# EAGLE board BSPD (EAGLE 9.2.1)
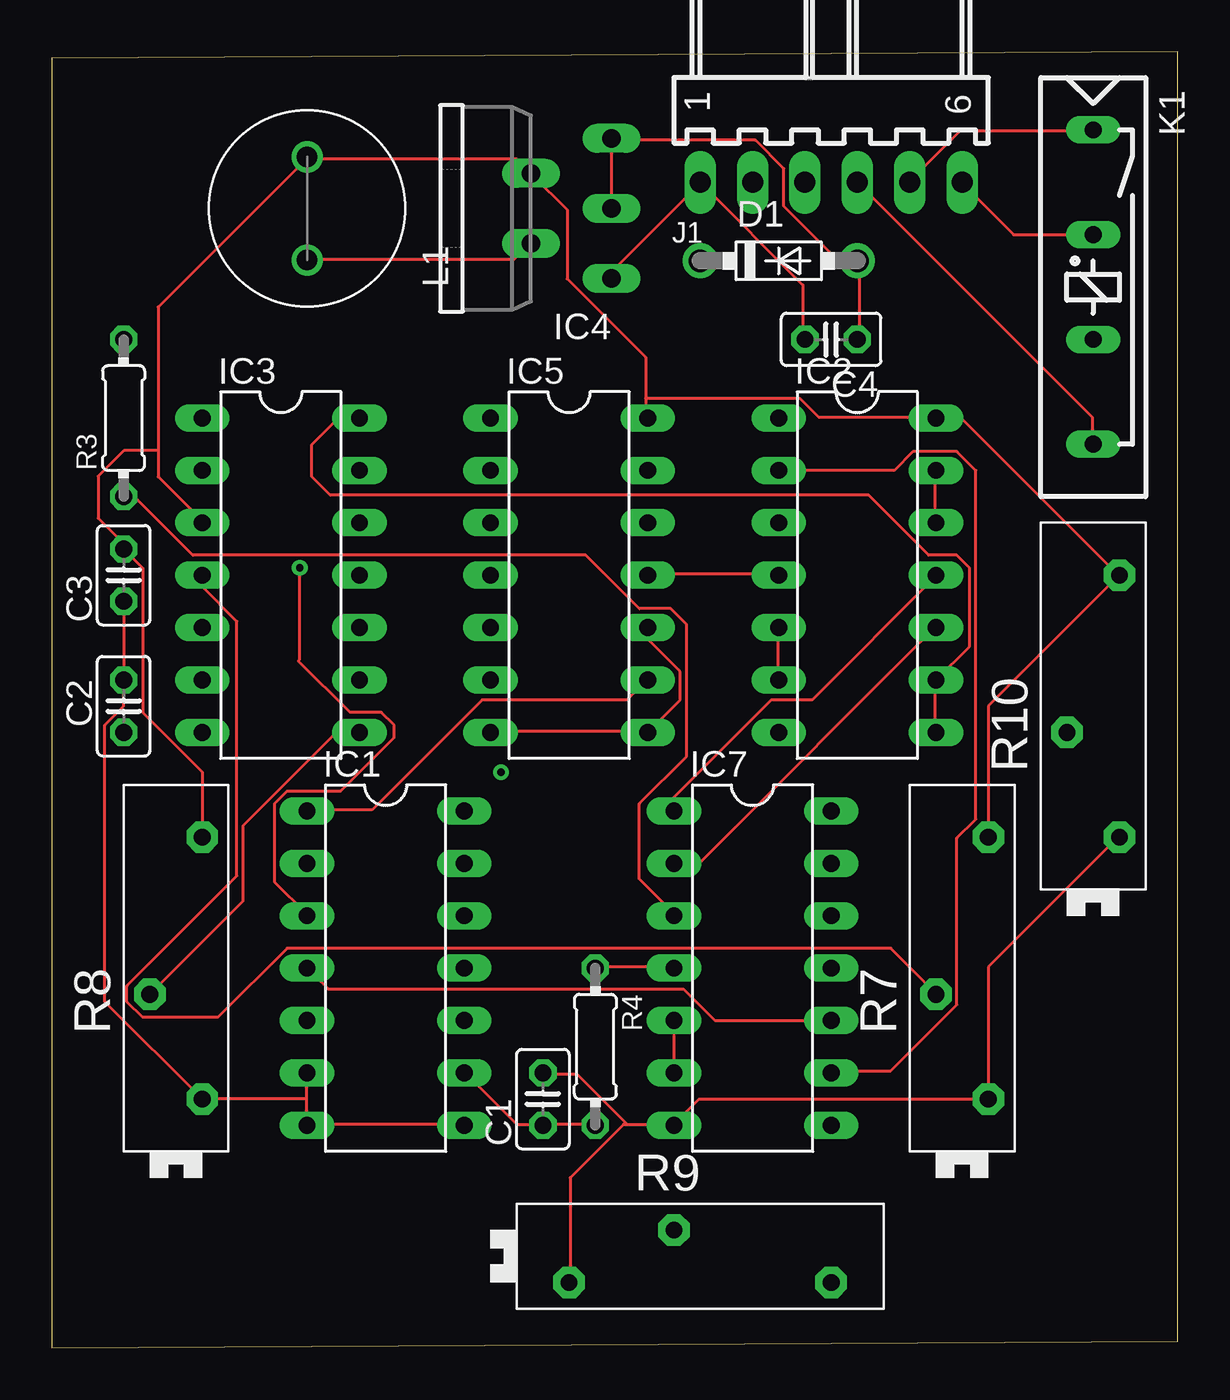
[diagram p0: board, top side]
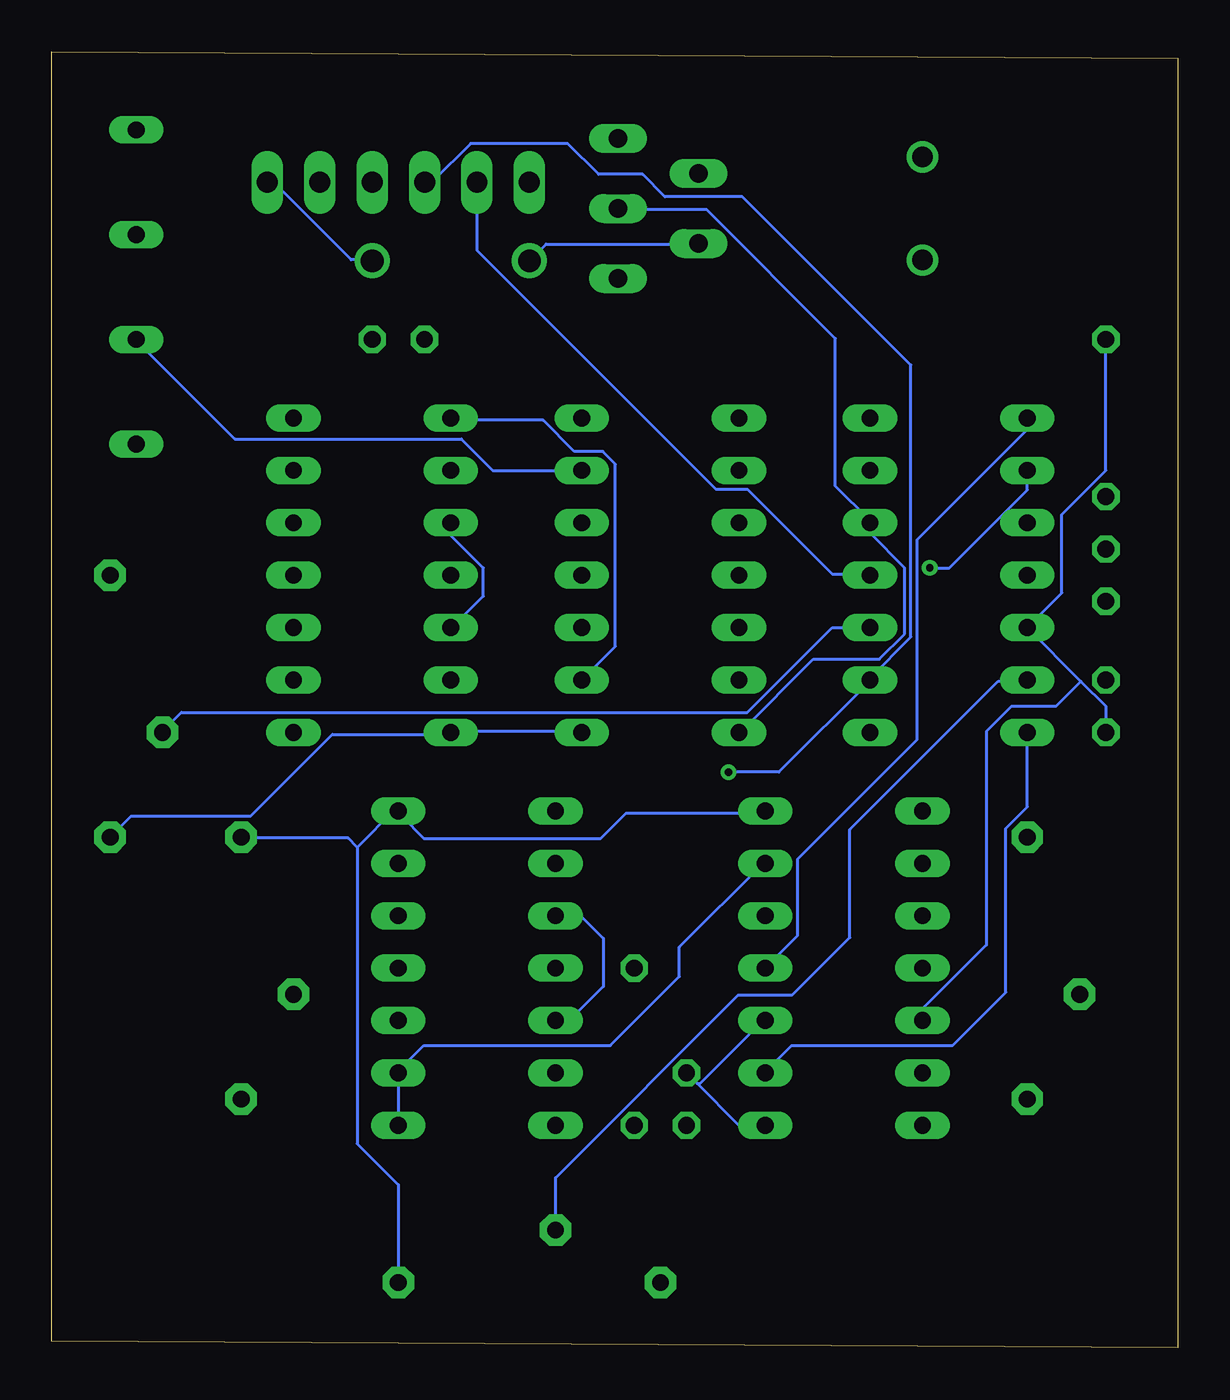
[diagram p1: board, bottom side, seen from below]

Size 54.59 x 62.85 mm. Coordinates in mm from the lower left corner, seen from the top.
Outline: 0,0 54.59,0.32 54.59,62.85 0,62.53 0,0
Copper layers (1*16): Top 0.035mm / dielectric 1.5mm / Bottom 0.035mm
Design rules "default": minimum track width 6mil, minimum drill 0.35mm, track to track 6mil, track to pad 6mil, pad to pad 6mil, via to via 6mil, smd to smd 6mil, copper to edge 40mil, drill to drill 6mil, minimum pad ring 10mil, minimum via ring 8mil, stop-mask expansion 4mil, vias tented up to drill 0mil, thermal gap 10mil

## Footprints (pad centres in the part's own frame; a part is rotated, then mirrored left to right if it is on the bottom)
C025-025X050 = drill 0.813 octagon: 1 -1.27,0; 2 1.27,0
DO41-7.6 = drill 1.1 pad 1.7: A 3.81,0; C -3.81,0
DIL14 = drill 0.813 long: 1 -7.62,-3.81; 2 -5.08,-3.81; 3 -2.54,-3.81; 4 0,-3.81; 5 2.54,-3.81; 6 5.08,-3.81; 7 7.62,-3.81; 8 7.62,3.81; 9 5.08,3.81; 10 2.54,3.81; 11 0,3.81; 12 -2.54,3.81; 13 -5.08,3.81; 14 -7.62,3.81
TO220-5 = drill 0.9 long: 1 -3.4,-8.4; 2 -1.7,-4.5; 3 0,-8.4; 4 1.7,-4.5; 5 3.4,-8.4
7395-06 = drill 1.016 long: 1 6.35,0; 2 3.81,0; 3 1.27,0; 4 -1.27,0; 5 -3.81,0; 6 -6.35,0
REED = drill 0.813 long: 1 -17.78,2.54; 3 -12.7,2.54; 5 -7.62,2.54; 7 -2.54,2.54
WE-TI_8012 = drill 1: 1 -2.5,0; 2 2.5,0
0204/7 = drill 0.813 octagon: 1 -3.81,0; 2 3.81,0
PT-SPIN = drill 0.813 pad 1.524 octagon: 1 -6.35,-1.27; 2 6.35,-1.27; 3 -1.27,1.27

## Placement (x,y rotation side)
C1  100mF  [C025-025X050]  23.81,12.06 90 top
C2  500uF  [C025-025X050]  3.49,31.12 90 top
C3  100uF  [C025-025X050]  3.49,37.47 90 top
C4  100uF  [C025-025X050]  37.78,48.89 180 top
D1  1N5817-B  [DO41-7.6]  35.24,52.7 0 top
IC1  4013N  [DIL14]  16.19,18.41 270 top
IC2  4001N  [DIL14]  39.05,37.47 270 top
IC3  LM2901N  [DIL14]  11.11,37.47 270 top
IC4  LM2576T  [TO220-5]  18.73,55.25 90 top
IC5  4013N  [DIL14]  25.08,37.47 270 top
IC7  4001N  [DIL14]  33.97,18.41 270 top
J1  22-05-7068-06  [7395-06]  37.78,56.52 180 top
K1  35701331  [REED]  47.94,41.28 270 top
L1  100uH  [WE-TI_8012]  12.38,55.25 90 top
R3  3k  [0204/7]  3.49,45.09 90 top
R4  3k  [0204/7]  26.35,14.61 270 top
R7  [PT-SPIN]  44.13,18.41 90 top
R8  [PT-SPIN]  6.03,18.41 90 top
R9  [PT-SPIN]  31.43,4.45 0 top
R10  [PT-SPIN]  50.48,31.12 90 top

## Library data of the parts
C1-C4 = rcl; SPICEPREFIX: C
D1 = diode
IC1 IC2 IC5 IC7 = 40xx
IC3 = linear
IC4 = v-reg-3
J1 = con-molex; MF: MOLEX; OC_FARNELL: unknown; OC_NEWARK: unknown
K1 = relay; OC_FARNELL: unknown; OC_NEWARK: unknown
L1 = wurth_elektronik_passive_rev16d
R3 R4 = rcl; SPICEPREFIX: R
R7-R10 = rcl; SPICEMODEL: POT; SPICEPREFIX: X

## Nets
0: C1.2 C2.2 C3.1 C4.1 D1.A IC1.6 IC1.7 IC1.8 IC1.10 IC2.7 IC3.12 IC4.3 IC4.5 IC5.7 IC5.8 IC5.10 IC7.7 J1.6 K1.3 R7.1 R8.1 R9.1 R10.1
5V: C3.2 IC1.14 IC2.14 IC3.3 IC4.4 IC5.14 IC7.14 L1.2 R7.2 R8.2 R9.2 R10.2
BP: IC3.9 J1.3
N$1: C2.1 IC1.5 IC3.5 R3.2
N$2: IC3.4 R7.3
N$3: C1.1 IC1.9 IC3.7 R4.2
N$4: IC3.6 R9.3
N$5: IC1.11 IC3.1
N$6: IC1.3 IC3.2
N$7: IC2.12 IC2.13
N$8: IC1.13 IC2.2 IC7.8 IC7.9
N$9: IC1.1 IC2.1 IC5.9
N$10: IC2.4 IC5.11
N$11: IC7.4 R4.1
N$12: IC5.13 K1.5
N$13: IC3.10 R10.3
N$14: IC3.8 R8.3
N$15: IC2.8 IC2.9 IC3.14
N$16: D1.C IC4.2 L1.1
N$17: IC2.11 IC7.1
N$18: IC2.10 IC7.2
N$19: IC2.3 IC2.5 IC2.6
N$21: IC1.4 IC7.10
OUT: J1.4 K1.7
SDS: J1.5 K1.1
TPS: IC3.11 J1.2
TPS&BP: IC7.3 IC7.5 IC7.6 R3.1
VBAT: C4.2 IC4.1 J1.1

## Tracks (layer width: path | path; a pad name or v marks a point on that pad's centre or on a via)
0
  Top 0.152: C3.1 C2.2 3.49,31.12 2.58,30.2 2.58,16.79 R8.1 12.33,12.06 | 12.33,12.06 12.33,13.28 IC1.6 | 12.33,12.06 12.33,10.85 IC1.7 12.48,10.85 19.95,10.85 IC1.8 | K1.3 46.62,53.97 44.18,56.41 J1.6 | IC4.3 27.11,55.35 27.11,58.55 IC4.5 27.27,58.55 34.12,58.55 35.5,57.17 35.5,55.35 38.09,52.76 39,52.76 D1.A 39.15,52.6 39.15,48.95 C4.1 | IC5.7 21.32,29.9 28.79,29.9 IC5.8 30.47,31.42 30.47,32.79 28.94,34.31 28.94,34.92 IC5.10 | R10.1 51.65,24.71 45.4,18.47 R7.1 31.38,12.06 30.16,10.85 | 27.89,10.85 27.72,10.85 25.13,8.26 25.13,3.23 R9.1 | 27.89,10.85 30.16,10.85 | 27.89,10.85 25.45,13.28 23.91,13.28 C1.2 | 30.16,10.85 IC7.7
  Bottom 0.152: J1.6 44.03,56.41 43.73,56.41 40.07,52.76 39.15,52.76 D1.A | IC5.7 21.17,29.9 17.67,33.4 14.47,33.4 13.25,34.62 13.25,37.82 14.92,39.5 IC3.12 14.92,40.11 16.6,41.78 16.6,48.95 22.85,55.19 27.11,55.19 IC4.3 | IC5.8 28.94,29.9 35.19,29.9 IC2.7 35.34,29.74 40.98,29.74 44.95,25.78 50.74,25.78 R10.1 | C1.2 23.3,12.83 | 23.3,12.83 21.32,10.85 20.1,10.85 IC1.8 | 23.3,12.83 23.15,12.83 20.1,15.88 IC1.10
5V
  Top 0.152: 5.17,43.51 3.51,43.51 2.26,42.27 2.26,40.23 3.49,39 C3.2 4.41,37.82 4.41,30.81 7.3,27.91 R8.2 | IC3.3 7.3,40.11 5.17,42.24 5.17,43.51 | 28.79,46.05 28.79,48.03 24.98,51.84 24.98,55.19 23.3,56.87 IC4.4 23.15,57.02 22.54,57.63 12.48,57.63 L1.2 12.33,57.63 5.17,50.47 5.17,43.51 | 28.79,46.05 28.79,45.14 IC5.14 | 28.79,46.05 36.26,46.05 37.17,45.14 42.81,45.14 IC2.14 42.96,44.98 44.18,44.98 51.65,37.52 R10.2 45.4,31.12 R7.2
  Bottom 0.152: 37.78,25.93 37.63,25.78 | 37.78,25.93 37.95,26.1 39.78,24.27 | 37.63,25.78 36.55,24.7 27.98,24.7 26.75,25.93 20.1,25.93 IC1.14 | 37.78,25.93 IC7.14 37.63,25.78 | R9.2 37.78,7.91 39.78,9.91 39.78,24.27 | 39.78,24.27 40.22,24.71 45.4,24.71 R7.2
BP  (via drill 0.35)
  Bottom 0.152: v21.78,27.91 19.34,27.91 14.92,32.33 IC3.9 14.92,32.49 12.94,34.47 12.94,47.65 21.11,55.82 24.87,55.82 25.95,56.9 28.08,56.9 29.58,58.39 34.28,58.39 36.11,56.57 36.41,56.57 J1.3
N$1
  Bottom 0.152: C2.1 3.49,31.12 4.7,32.32 | 4.7,32.32 IC3.5 5.63,36.6 5.63,40.41 3.49,42.55 R3.2 | 4.7,32.32 5.92,31.1 8.08,31.1 9.28,29.9 9.28,19.53 12.33,16.48 12.33,15.88 IC1.5
N$2
  Top 0.152: IC3.4 7.3,36.91 8.98,35.23 8.98,22.88 3.64,17.55 3.64,16.79 4.41,16.03 8.06,16.03 11.42,19.38 40.68,19.38 42.81,17.25 R7.3
N$3
  Top 0.152: R4.2 26.35,10.85 23.91,10.85 C1.1 23.76,10.85 22.54,10.85 20.1,13.28 IC1.9
  Bottom 0.152: IC3.7 7.3,26.24 8.34,25.2 8.34,17.25 10.92,14.67 18.72,14.67 19.95,13.44 IC1.9
N$4
  Bottom 0.152: R9.3 30.16,8.26 21.31,17.11 18.69,17.11 15.9,19.9 15.9,25.13 8.7,32.33 7.3,32.33 IC3.6
N$5
  Bottom 0.152: IC3.1 7.3,44.53 12.64,39.19 12.64,29.49 18.43,23.7 18.43,19.99 IC1.11
N$6  (via drill 0.35)
  Top 0.152: v12.03,37.82 12.03,33.38 11.96,33.31 14.47,30.81 15.99,30.81 16.6,30.2 16.6,29.59 14.01,27 11.42,27 10.81,26.39 10.81,22.58 12.33,21.06 IC1.3
  Bottom 0.152: v12.03,37.82 11.07,37.82 7.3,41.59 IC3.2
N$7
  Top 0.152: IC2.12 42.81,40.11 42.81,42.55 IC2.13
N$8
  Top 0.152: IC2.2 40.83,42.55 41.74,43.46 43.88,43.46 44.79,42.55 44.79,25.63 43.88,24.71 43.88,16.64 40.68,13.44 37.78,13.44 IC7.9
  Bottom 0.152: IC7.8 IC7.9 37.78,13.44 36.55,14.67 27.51,14.67 24.17,18.01 24.17,19.43 20.1,23.5 IC1.13
N$9
  Top 0.152: IC1.1 12.48,26.09 15.53,26.09 20.87,31.42 27.88,31.42 28.79,32.33 IC5.9
  Bottom 0.152: IC5.9 27.27,34.01 27.27,42.85 27.88,43.46 29.25,43.46 30.77,44.98 35.19,44.98 IC2.1
N$10
  Top 0.152: IC5.11 28.94,37.52 35.19,37.52 IC2.4
N$11
  Top 0.152: R4.1 26.35,18.47 30.16,18.47 IC7.4
N$12
  Bottom 0.152: IC5.13 33.21,42.55 34.73,44.07 45.71,44.07 50.43,48.79 K1.5
N$13
  Bottom 0.152: IC3.10 16.75,34.92 20.87,30.81 48.3,30.81 49.21,29.9 R10.3
N$14
  Top 0.152: R8.3 9.28,21.67 9.28,25.32 13.7,29.74 14.92,29.74 IC3.8
N$15
  Top 0.152: IC2.8 42.81,29.9 42.81,32.33 IC2.9 44.49,34.01 44.49,37.82 43.88,38.43 42.51,38.43 39.6,41.34 13.51,41.34 12.61,42.24 12.61,43.8 13.89,45.09 IC3.14
N$16
  Top 0.152: L1.1 12.48,52.76 22.39,52.76 23.15,53.52 IC4.2
  Bottom 0.152: D1.C 30.62,53.52 23.3,53.52 IC4.2
N$17
  Top 0.152: IC7.1 30.16,26.7 34.89,31.42 36.87,31.42 42.81,37.36 IC2.11
N$18
  Top 0.152: IC7.2 31.38,23.5 42.81,34.92 IC2.10
N$19
  Top 0.152: IC2.6 35.19,32.49 35.19,34.92 IC2.5
  Bottom 0.152: IC2.3 35.19,39.95 35.19,39.34 33.67,37.82 33.67,36.45 35.19,34.92 IC2.5
N$21
  Top 0.152: IC7.10 32.14,15.88 30.62,17.4 13.4,17.4 IC1.4
OUT
  Top 0.152: J1.4 50.43,45.14 50.43,43.92 K1.7
SDS
  Top 0.152: K1.1 50.43,59 44.03,59 41.59,56.57 J1.5
TPS
  Bottom 0.152: J1.2 33.97,53.21 22.39,41.63 20.87,41.63 16.75,37.52 14.92,37.52 IC3.11
TPS&BP
  Top 0.152: IC7.5 IC7.6 | R3.1 3.49,41.17 4.1,41.17 6.85,38.43 25.9,38.43 28.49,35.84 30.01,35.84 30.77,35.08 30.77,28.68 28.49,26.39 28.49,22.73 30.16,21.06 IC7.3
  Bottom 0.152: IC7.5 29.5,15.88 27.85,17.53 27.85,19.86 28.94,20.95 IC7.3
VBAT
  Top 0.152: C4.2 36.41,48.95 36.41,51.54 J1.1 31.38,56.41 27.27,52.3 27.27,51.99 IC4.1